# EAGLE board pcb (EAGLE 9.7.0)
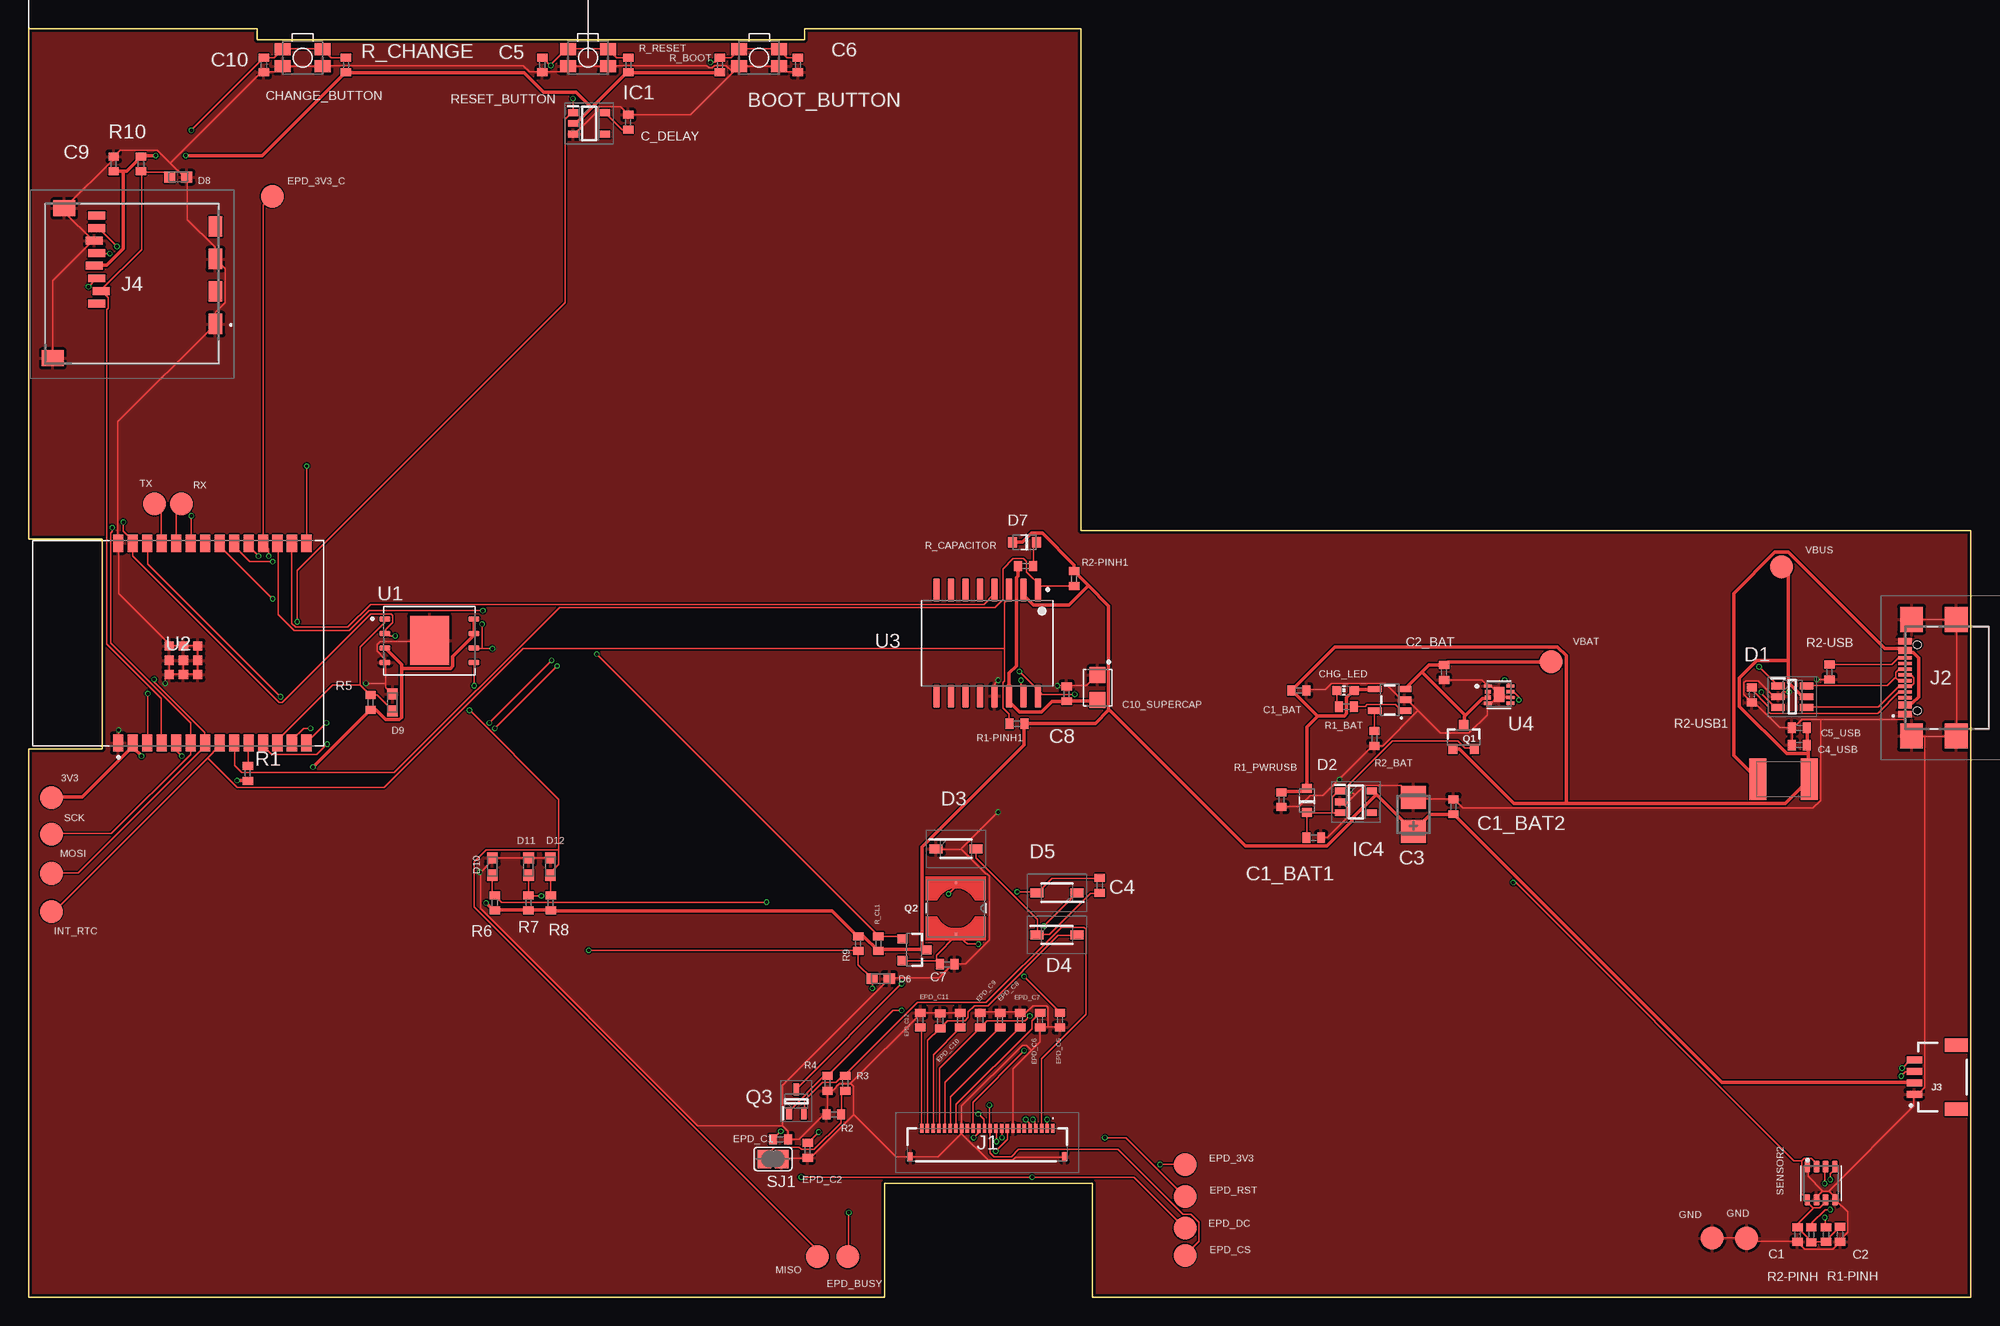
[diagram p0: board, top side]
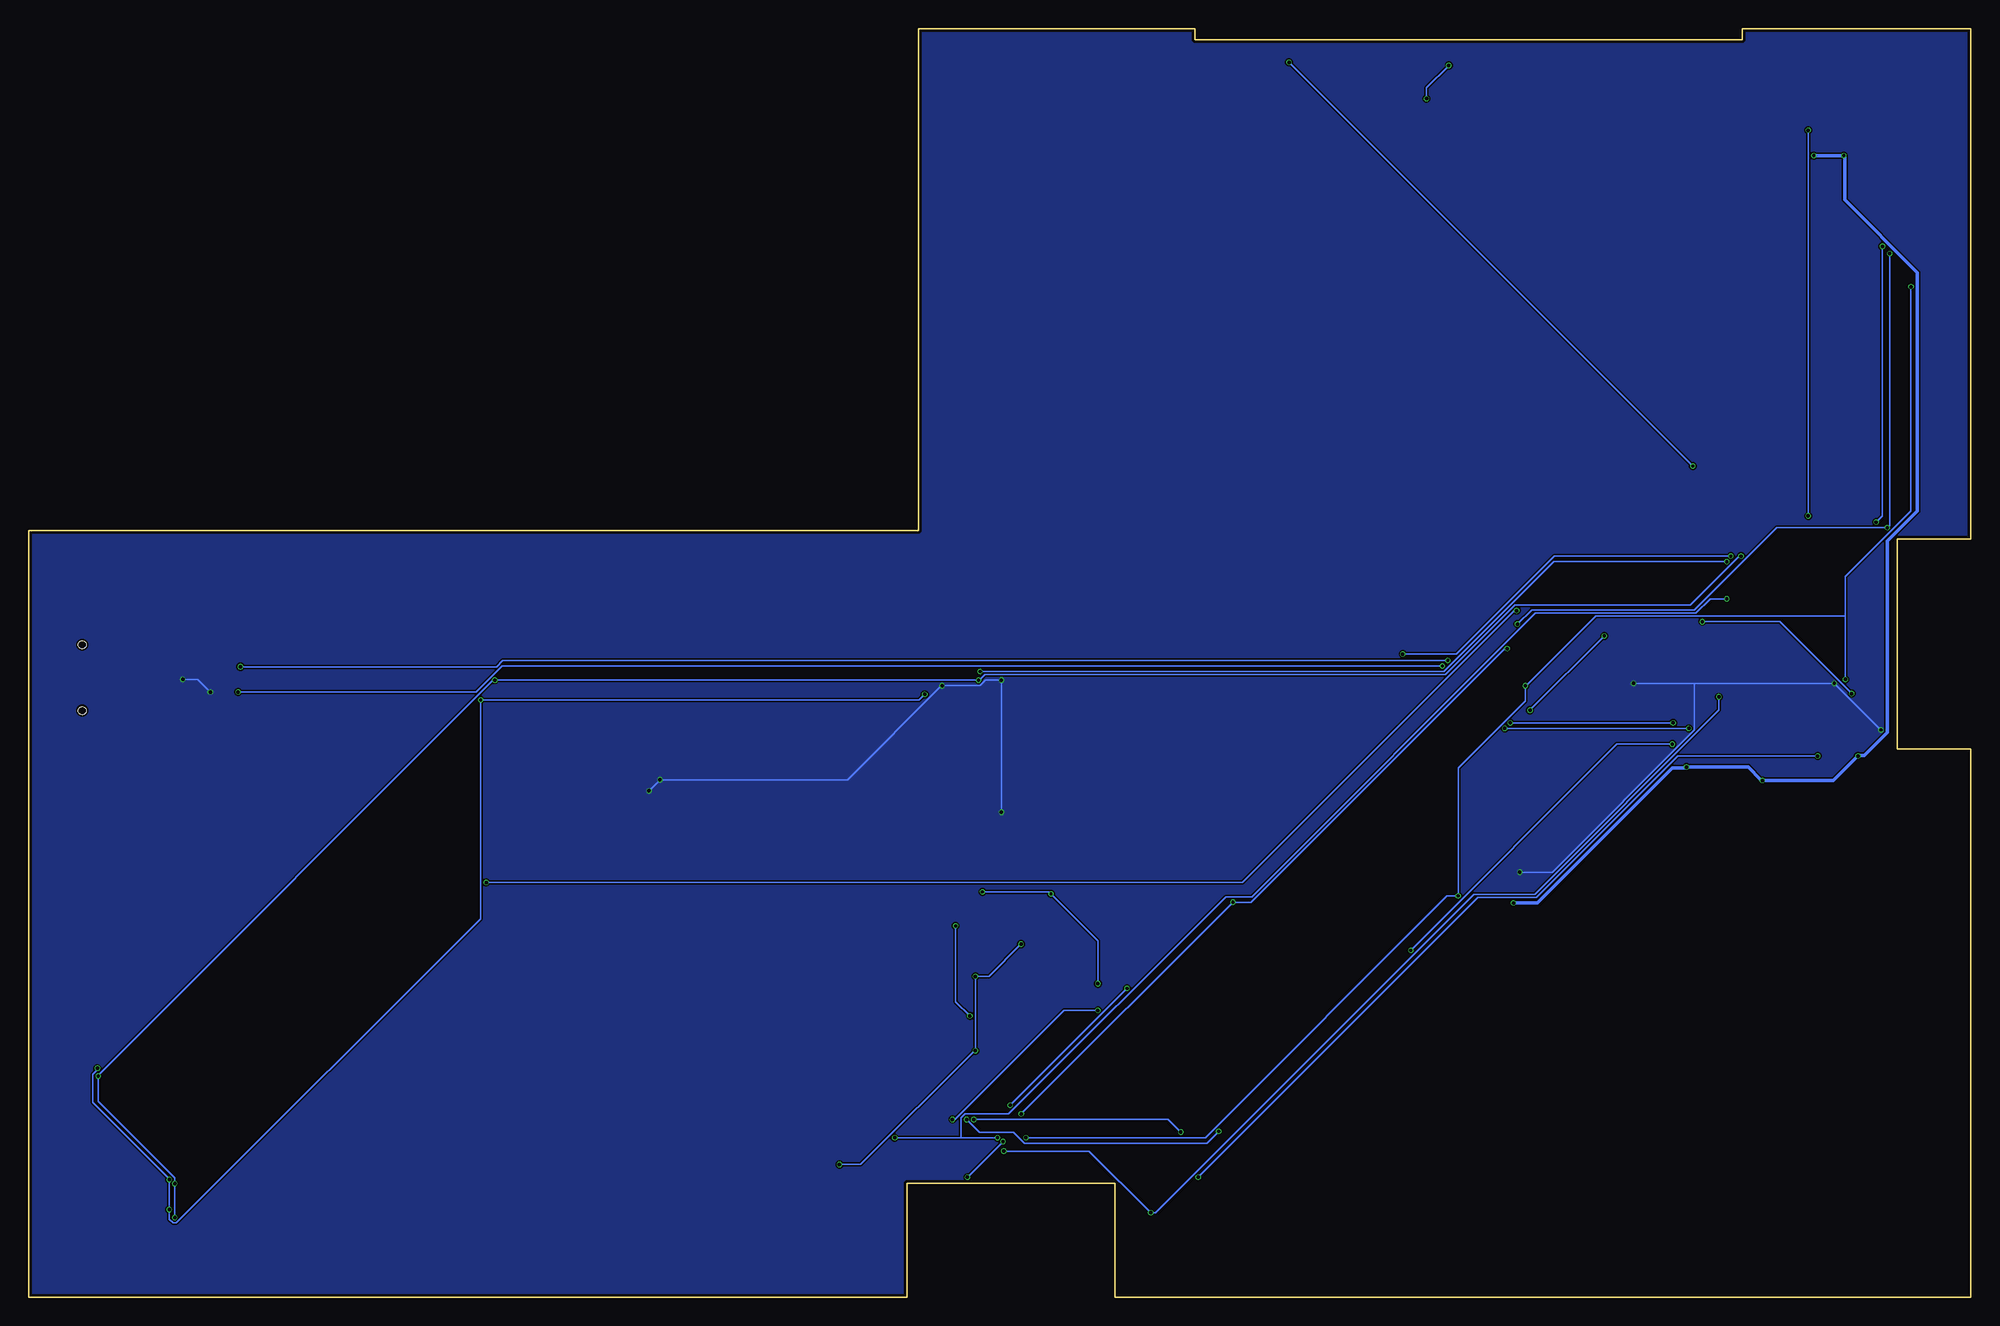
[diagram p1: board, bottom side, seen from below]

Size 170.2 x 111.2 mm. Coordinates in mm from the lower left corner, seen from the top.
Outline: 0,111.2 20,111.2 20,110.2 68,110.2 68,111.2 92.2,111.2 92.2,67.2 170.2,67.2 170.2,0 93.2,0 93.2,10 75,10 75,0 0,0 0,48.05 6.45,48.05 6.45,66.46 0,66.46 0,111.2
Copper layers (1*16): Top 0.035mm / dielectric 1.6mm / Bottom 0.035mm
Design rules "jlcpcb-2layers.dru *": minimum track width 0.15mm, minimum drill 0.3mm, track to track 5mil, track to pad 5mil, pad to pad 5mil, via to via 5mil, smd to smd 5mil, copper to edge 0.2mm, drill to drill 6mil, minimum pad ring 10mil, minimum via ring 3mil, stop-mask expansion 4mil, vias tented up to drill 0mil, thermal gap 10mil
Net classes: 1 putere: width 0.3 mm

## Footprints (pad centres in the part's own frame; a part is rotated, then mirrored left to right if it is on the bottom)
MYBUTTON = smd 1.4 x 1.05: 1 1.75,0.75; 2 -1.75,0.75; 3 -1.75,-0.75; 4 1.75,-0.75
EAGLE-LTSPICE_C0402 = smd 0.7 x 0.9: 1 -0.65,0; 2 0.65,0
RCL_CT3528 = smd 2 x 2.2: + -1.5,0; - 1.5,0
CAPCP3225X100N = smd 1.4 x 1.4: 1 -1.1,0; 2 1.1,0
ADAFRUIT_CHIP-LED0603 = smd 0.8 x 0.8: A 0,-0.75; C 0,0.75
SOT95P280X145-6N = smd 1.2 x 0.6: 1 -1.25,0.95; 2 -1.25,0; 3 -1.25,-0.95; 4 1.25,-0.95; 5 1.25,0; 6 1.25,0.95
ESP32_WROVER_AVX---SD0805S020S1R0_AVX_SD0805S020S1R0_0 = smd 0.8 x 0.9: 1 -1.05,0; 2 1.05,0
SOD3716X135N = smd 1.15 x 0.8: 1 -1.75,0; 2 1.75,0
DIOC1608X36N = smd 0.97 x 0.94: 1 -0.75,0; 2 0.75,0
SOT95P280X125-5N = smd 0.9 x 0.6: 1 -1.4,0.95; 2 -1.4,0; 3 -1.4,-0.95; 4 1.4,-0.95; 5 1.4,0.95
SOT95P280X120-5N = smd 0.9 x 0.6: 1 -1.4,0.95; 2 -1.4,0; 3 -1.4,-0.95; 4 1.4,-0.95; 5 1.4,0.95
FH34SRJ24S05SH99 = smd 0.3 x 0.8: 1 5.75,1.45; 2 5.25,1.45; 3 4.75,1.45; 4 4.25,1.45; 5 3.75,1.45; 6 3.25,1.45; 7 2.75,1.45; 8 2.25,1.45; 9 1.75,1.45; 10 1.25,1.45; 11 0.75,1.45; 12 0.25,1.45; 13 -0.25,1.45; 14 -0.75,1.45; 15 -1.25,1.45; 16 -1.75,1.45; 17 -2.25,1.45; 18 -2.75,1.45; 19 -3.25,1.45; 20 -3.75,1.45; 21 -4.25,1.45; 22 -4.75,1.45; 23 -5.25,1.45; 24 -5.75,1.45 | smd 0.4 x 0.8: MP1 6.75,-1.05; MP2 -6.75,-1.05
SAMACSYS_PARTS_USB4110GFA = smd 0.3 x 1.15: A1 -3.35,3.678; A4 -2.55,3.678; A5 -1.25,3.678; A6 -0.25,3.678; A7 0.25,3.678; A8 1.25,3.678; A9 2.55,3.678; A12 3.35,3.678; B1 3.05,3.678; B4 2.25,3.678; B5 1.75,3.678; B6 0.75,3.678; B7 -0.75,3.678; B8 -1.75,3.678; B9 -2.25,3.678; B12 -3.05,3.678 | smd 2.18 x 2: MP1 -5.11,-0.827; MP2 5.11,-0.827; MP3 -5.11,3.103; MP4 5.11,3.103 | hole 0.65: -2.89,2.603; 2.89,2.603
JST04_1MM_RA = smd 0.6 x 1.35: 1 -1.5,0; 2 -0.5,0; 3 0.5,0; 4 1.5,0 | smd 1.2 x 2: NC1 2.8,-3.675; NC2 -2.8,-3.675
112ATAARR03ATTEND = smd 1.8 x 1.2: G1 10.6,10.4; G2 4.9,10.4; S1 7.75,10.4; S2 2.05,10.4 | smd 1.4 x 1.9: G3 13.6,-3.85; G4 0.45,-2.85 | smd 0.7 x 1.5: P1 8.8,0; P2 7.7,0.4; P3 6.6,0; P4 5.5,-0.2; P5 4.4,0; P6 3.3,-0.2; P7 2.2,0; P8 1.1,0
IND_4828-WE-TPC_WRE = smd 0.254 x 0.152: 1 -2.286,0; 2 2.286,0
ESP32_WROVER_SPARKFUN-IC-POWER_SOT23-5 = smd 0.55 x 1.2: 1 -0.95,-1.3; 2 0,-1.3; 3 0.95,-1.3; 4 0.95,1.3; 5 -0.95,1.3
ESP32C6_VARISTOR_CT/CN1812 = smd 1.5 x 3.6: 1 -2.25,0; 2 2.25,0
ESP32_WROVER_SPARKFUN-DISCRETESEMI_SOT23-3 = smd 0.8 x 0.9: 1 -0.95,-1; 2 0.95,-1; 3 0,1.1
SOT65P210X110-3N = smd 1.05 x 0.5: 1 -1.05,0.65; 2 -1.05,-0.65; 3 1.05,0
ESP32_WROVER_EAGLE-LTSPICE_R0402 = smd 0.7 x 0.9: 1 -0.65,0; 2 0.65,0
ESP32_WROVER_BME680_PSON80P300X300X100-8N = smd 1.016 x 0.5: 1 1.458,1.2; 2 1.458,0.4; 3 1.458,-0.4; 4 1.458,-1.2; 5 -1.458,-1.22; 6 -1.458,-0.4; 7 -1.458,0.4; 8 -1.458,1.2
SJ = smd 1.168 x 1.6: 1 -0.762,0; 2 0.762,0
TP20R = smd 2 x 2: TP 0,0
SON127P600X800X80-9N = smd 0.94 x 0.44: 1 -3.895,1.905; 2 -3.895,0.635; 3 -3.895,-0.635; 4 -3.895,-1.905; 5 3.895,-1.905; 6 3.895,-0.635; 7 3.895,0.635; 8 3.895,1.905 | smd 3.4 x 4.3: 9 0,0
XCVR_ESP32-C6-WROOM-1-N8 = smd 1.5 x 0.9: 1 -8.75,5.26; 2 -8.75,3.99; 3 -8.75,2.72; 4 -8.75,1.45; 5 -8.75,0.18; 6 -8.75,-1.09; 7 -8.75,-2.36; 8 -8.75,-3.63; 9 -8.75,-4.9; 10 -8.75,-6.17; 11 -8.75,-7.44; 12 -8.75,-8.71; 13 -8.75,-9.98; 14 -8.75,-11.25; 15 8.75,-11.25; 16 8.75,-9.98; 17 8.75,-8.71; 18 8.75,-7.44; 19 8.75,-6.17; 20 8.75,-4.9; 21 8.75,-3.63; 22 8.75,-2.36; 23 8.75,-1.09; 24 8.75,0.18; 25 8.75,1.45; 26 8.75,2.72; 27 8.75,3.99; 28 8.75,5.26 | smd 0.8 x 0.8: 29_1 -2.755,0.79; 29_2 -1.505,0.79; 29_3 -0.255,0.79; 29_4 -2.755,-0.46; 29_5 -1.505,-0.46; 29_6 -0.255,-0.46; 29_7 -2.755,-1.71; 29_8 -1.505,-1.71; 29_9 -0.255,-1.71
SOIC127P1032X265-16N = smd 2.05 x 0.59: 1 -4.655,4.445; 2 -4.655,3.175; 3 -4.655,1.905; 4 -4.655,0.635; 5 -4.655,-0.635; 6 -4.655,-1.905; 7 -4.655,-3.175; 8 -4.655,-4.445; 9 4.655,-4.445; 10 4.655,-3.175; 11 4.655,-1.905; 12 4.655,-0.635; 13 4.655,0.635; 14 4.655,1.905; 15 4.655,3.175; 16 4.655,4.445
SON50P200X200X80-9N = smd 0.76 x 0.27: 1 -0.985,0.75; 4 -0.985,-0.75; 5 0.985,-0.75; 6 0.985,-0.25; 7 0.985,0.25; 8 0.985,0.75 | smd 0.61 x 0.305: 2 -0.985,0.25; 3 -0.985,-0.25 | smd 0.9 x 1.3: 9 0,0

## Placement (x,y rotation side)
BOOT_BUTTON  BUTTON_CUSYOMV1  [MYBUTTON]  64,108.65 180 top
C1  100nF  [EAGLE-LTSPICE_C0402]  155,5.5 270 top
C1_BAT  4.7uF  [EAGLE-LTSPICE_C0402]  111.31,53.19 0 top
C1_BAT1  4.7uF  [EAGLE-LTSPICE_C0402]  112.61,40.28 0 top
C1_BAT2  4.7uF  [EAGLE-LTSPICE_C0402]  124.85,42.99 90 top
C2  100nF  [EAGLE-LTSPICE_C0402]  158.73,5.51 270 top
C2_BAT  4.7uF  [EAGLE-LTSPICE_C0402]  124.03,54.77 270 top
C3  100uF TANT  [RCL_CT3528]  121.34,42.32 90 top
C4  4.7uF/25V  [EAGLE-LTSPICE_C0402]  93.85,36.09 90 top
C4_USB  100nF  [EAGLE-LTSPICE_C0402]  155.15,48.4 180 top
C5  1uF  [EAGLE-LTSPICE_C0402]  45.01,108 270 top
C5_USB  4.7uF  [EAGLE-LTSPICE_C0402]  155.15,49.91 180 top
C6  100nF  [EAGLE-LTSPICE_C0402]  67.4,108 270 top
C7  10uF  [EAGLE-LTSPICE_C0402]  80.49,29.19 0 top
C8  100nF  [EAGLE-LTSPICE_C0402]  90.95,52.89 90 top
C9  100nF  [EAGLE-LTSPICE_C0402]  7.43,99.33 90 top
C10  100nF  [EAGLE-LTSPICE_C0402]  20.61,108 270 top
C10_SUPERCAP  CPH3225A  [CAPCP3225X100N]  93.66,53.43 270 top
C_DELAY  100nF  [EAGLE-LTSPICE_C0402]  52.53,102.98 90 top
CHANGE_BUTTON  BUTTON_CUSYOMV1  [MYBUTTON]  24,108.65 180 top
CHG_LED  LED  [ADAFRUIT_CHIP-LED0603]  115.4,53.19 90 top
D1  USBLC6-2SC6Y  [SOT95P280X145-6N]  154.54,52.64 0 top
D2  ESP32_WROVER_AVX---SD0805S020S1R0_AVX_SD0805S020S1R0_0_0AVX_SD0805S020S1R0_0_0  [ESP32_WROVER_AVX---SD0805S020S1R0_AVX_SD0805S020S1R0_0]  112,43.55 90 top
D3  MBR0530  [SOD3716X135N]  81.25,39.31 0 top
D4  MBR0530  [SOD3716X135N]  90.09,31.77 0 top
D5  MBR0530  [SOD3716X135N]  90.09,35.45 180 top
D6  PGB1010603MR  [DIOC1608X36N]  74.66,27.92 180 top
D7  ESP32_WROVER_AVX---SD0805S020S1R0_AVX_SD0805S020S1R0_0_0AVX_SD0805S020S1R0_0_0  [ESP32_WROVER_AVX---SD0805S020S1R0_AVX_SD0805S020S1R0_0]  87.27,66.17 180 top
D8  PGB1010603MR  [DIOC1608X36N]  13.1,98.18 180 top
D9  PGB1010603MR  [DIOC1608X36N]  31.87,52.14 270 top
D10  PGB1010603MR  [DIOC1608X36N]  40.62,37.74 270 top
D11  PGB1010603MR  [DIOC1608X36N]  43.8,37.74 270 top
D12  PGB1010603MR  [DIOC1608X36N]  45.71,37.74 270 top
EPD_C1  1uF/50V  [EAGLE-LTSPICE_C0402]  65.87,13.85 0 top
EPD_C2  1uF/50V  [EAGLE-LTSPICE_C0402]  68.25,12.88 270 top
EPD_C5  0.1uF/50V  [EAGLE-LTSPICE_C0402]  90.38,24.3 270 top
EPD_C6  1uF/50V  [EAGLE-LTSPICE_C0402]  88.62,24.3 270 top
EPD_C7  1uF/50V  [EAGLE-LTSPICE_C0402]  86.88,24.3 90 top
EPD_C8  1uF/50V  [EAGLE-LTSPICE_C0402]  85.12,24.3 90 top
EPD_C9  1uF/50V  [EAGLE-LTSPICE_C0402]  83.38,24.3 90 top
EPD_C10  1uF/50V  [EAGLE-LTSPICE_C0402]  81.62,24.3 90 top
EPD_C11  1uF/50V  [EAGLE-LTSPICE_C0402]  79.88,24.23 90 top
EPD_C12  1uF/50V  [EAGLE-LTSPICE_C0402]  78.12,24.3 90 top
IC1  BD5229G-TR  [SOT95P280X125-5N]  49.1,102.88 0 top
IC4  XC6220A331MR-G  [SOT95P280X120-5N]  116.3,43.41 0 top
J1  FH34SRJ-24S-0.5SH_99_  [FH34SRJ24S05SH99]  84,13.35 0 top
J2  SAMACSYS_PARTS_USB4110-GF-A  [SAMACSYS_PARTS_USB4110GFA]  168.1,54.3 90 top
J3  QWIIC_RIGHT_ANGLE  [JST04_1MM_RA]  165.25,19.3 90 top
J4  112A-TAAR-R03_ATTEND  [112ATAARR03ATTEND]  5.95,95.9 270 top
L1  68uH  [IND_4828-WE-TPC_WRE]  81.25,34.09 270 top
MCP73831  ESP32_WROVER_SPARKFUN-IC-POWER_MCP73831  [ESP32_WROVER_SPARKFUN-IC-POWER_SOT23-5]  119.26,52.37 90 top
PFMF.050.1  ESP32C6_VARISTORCN1812  [ESP32C6_VARISTOR_CT/CN1812]  153.78,45.4 0 top
Q1  20V/4.2A/52mΩ/1.4W  [ESP32_WROVER_SPARKFUN-DISCRETESEMI_SOT23-3]  125.74,49.06 0 top
Q2  20V/4.2A/52mΩ/1.4W  [ESP32_WROVER_SPARKFUN-DISCRETESEMI_SOT23-3]  77.56,30.46 270 top
Q3  SI1308EDL-T1-GE3  [SOT65P210X110-3N]  67.27,17.18 90 top
R1  10K  [ESP32_WROVER_EAGLE-LTSPICE_R0402]  19.2,45.91 270 top
R1-PINH  10K  [ESP32_WROVER_EAGLE-LTSPICE_R0402]  157.5,5.5 270 top
R1-PINH1  10K  [ESP32_WROVER_EAGLE-LTSPICE_R0402]  86.6,50.27 0 top
R1_BAT  200  [ESP32_WROVER_EAGLE-LTSPICE_R0402]  115.48,51.76 0 top
R1_PWRUSB  100K  [ESP32_WROVER_EAGLE-LTSPICE_R0402]  109.78,43.6 90 top
R2  2.2  [ESP32_WROVER_EAGLE-LTSPICE_R0402]  70.55,16.04 0 top
R2-PINH  10K  [ESP32_WROVER_EAGLE-LTSPICE_R0402]  156.22,5.49 270 top
R2-PINH1  10K  [ESP32_WROVER_EAGLE-LTSPICE_R0402]  91.61,62.98 90 top
R2-USB  5k1  [ESP32_WROVER_EAGLE-LTSPICE_R0402]  157.8,54.8 90 top
R2-USB1  5k1  [ESP32_WROVER_EAGLE-LTSPICE_R0402]  150.99,52.8 90 top
R2_BAT  2K  [ESP32_WROVER_EAGLE-LTSPICE_R0402]  117.92,48.98 90 top
R3  0.47  [ESP32_WROVER_EAGLE-LTSPICE_R0402]  71.56,18.76 90 top
R4  10K  [ESP32_WROVER_EAGLE-LTSPICE_R0402]  69.99,18.76 90 top
R5  10K  [ESP32_WROVER_EAGLE-LTSPICE_R0402]  29.95,52.13 270 top
R6  10K  [ESP32_WROVER_EAGLE-LTSPICE_R0402]  40.84,34.58 270 top
R7  10K  [ESP32_WROVER_EAGLE-LTSPICE_R0402]  43.79,34.58 270 top
R8  10K  [ESP32_WROVER_EAGLE-LTSPICE_R0402]  45.74,34.58 270 top
R9  10K  [ESP32_WROVER_EAGLE-LTSPICE_R0402]  72.68,31 90 top
R10  10K  [ESP32_WROVER_EAGLE-LTSPICE_R0402]  9.83,99.33 90 top
R_BOOT  10K  [ESP32_WROVER_EAGLE-LTSPICE_R0402]  60.56,108 270 top
R_CAPACITOR  15  [ESP32_WROVER_EAGLE-LTSPICE_R0402]  87.36,64.09 180 top
R_CHANGE  10K  [ESP32_WROVER_EAGLE-LTSPICE_R0402]  27.8,108 270 top
R_CL1  10K  [ESP32_WROVER_EAGLE-LTSPICE_R0402]  74.45,31 270 top
R_RESET  10K  [ESP32_WROVER_EAGLE-LTSPICE_R0402]  52.55,108 270 top
RESET_BUTTON  BUTTON_CUSYOMV1  [MYBUTTON]  49,108.65 180 top
SENSOR2  ESP32_WROVER_BME680_BME680  [ESP32_WROVER_BME680_PSON80P300X300X100-8N]  157.06,10 90 top
SJ1  SJ  [SJ]  65.22,12.12 180 top
TP1  TPTP20R  [TP20R]  11.02,69.54 0 top
TP2  TPTP20R  [TP20R]  13.36,69.54 0 top
TP3  TPTP20R  [TP20R]  133.41,55.69 0 top
TP4  TPTP20R  [TP20R]  147.53,5.17 0 top
TP5  TPTP20R  [TP20R]  150.54,5.17 0 top
TP6  TPTP20R  [TP20R]  69.11,3.56 0 top
TP7  TPTP20R  [TP20R]  1.97,37.15 0 top
TP8  TPTP20R  [TP20R]  1.97,40.59 0 top
TP9  TPTP20R  [TP20R]  71.78,3.56 0 top
TP10  TPTP20R  [TP20R]  101.33,3.68 0 top
TP11  TPTP20R  [TP20R]  101.33,6.05 0 top
TP12  TPTP20R  [TP20R]  101.33,8.84 0 top
TP13  TPTP20R  [TP20R]  21.34,96.5 0 top
TP14  TPTP20R  [TP20R]  153.6,64.02 0 top
TP15  TPTP20R  [TP20R]  1.97,33.81 0 top
TP16  TPTP20R  [TP20R]  1.97,43.8 0 top
TP17  TPTP20R  [TP20R]  101.33,11.63 0 top
U1  W25Q512JVEIQ  [SON127P600X800X80-9N]  35.12,57.55 0 top
U2  ESP32-C6-WROOM-1-N8  [XCVR_ESP32-C6-WROOM-1-N8]  13.09,57.34 90 top
U3  DS3231SN#  [SOIC127P1032X265-16N]  84,57.34 270 top
U4  MAX17048G+T10  [SON50P200X200X80-9N]  128.84,52.82 0 top

## Library data of the parts
BOOT_BUTTON CHANGE_BUTTON CHG_LED PFMF.050.1 RESET_BUTTON SJ1 TP1-TP17 = DeskAssistant v19 v1
C1 C1_BAT C1_BAT1 C1_BAT2 C2 C2_BAT C4 C4_USB C5 C5_USB C6-C10 C_DELAY EPD_C1 EPD_C2 EPD_C5-EPD_C12 = DeskAssistant v19 v1; SPICEMODEL: NONE; SPICEPREFIX: C
C3 = DeskAssistant v19 v1; SPICEPREFIX: C
C10_SUPERCAP = DeskAssistant v19 v1; AVAILABILITY: Not in stock; CHECK_PRICES: https://www.snapeda.com/parts/CPH3225A/Seiko+Instruments/view-part/?ref=eda; DESCRIPTION: 11 mF (EDLC) Supercapacitor 3.3 V 1210 (3225 Metric) - -; MF: Seiko Instruments; MP: CPH3225A; PACKAGE: 1210 Seiko; PRICE: None; PURCHASE-URL: https://www.snapeda.com/api/url_track_click_mouser/?unipart_id=562593&manufacturer=Seiko Instruments&part_name=CPH3225A&search_term=None; SNAPEDA_LINK: https://www.snapeda.com/parts/CPH3225A/Seiko+Instruments/view-part/?ref=snap
D1 = DeskAssistant v19 v1; AVAILABILITY: In Stock; CHECK_PRICES: https://www.snapeda.com/parts/USBLC6-2SC6Y/STMicroelectronics/view-part/?ref=eda; DESCRIPTION: 17V Clamp 5A (8/20µs) Ipp Tvs Diode Surface Mount SOT-23-6; MF: STMicroelectronics; MP: USBLC6-2SC6Y; PACKAGE: SOT-23-6 STMicroelectronics; PRICE: None; SNAPEDA_LINK: https://www.snapeda.com/parts/USBLC6-2SC6Y/STMicroelectronics/view-part/?ref=snap
D2 D7 = DeskAssistant v19 v1; CENTROID_NOT_SPECIFIED: No; DATASHEET: http://datasheets.avx.com/schottky.pdf; DIGIKEY_DESCRIPTION: DIODE SCHOTTKY 20V 1A 0805; DIGIKEY_PART_NUMBER: 478-7800-1-ND; LEAD_FREE: yes; MF: AVX; MOUSER_PART_NUMBER: 581-SD0805S020S1R0; PACKAGE: 0805 (2012 metric); PREFIX: D; ROHS: yes; TEMPERATURE_RANGE_HIGH: +125°C; TEMPERATURE_RANGE_LOW: -55°C
D3-D5 = DeskAssistant v19 v1; AVAILABILITY: In Stock; CHECK_PRICES: https://www.snapeda.com/parts/MBR0530/Onsemi/view-part/?ref=eda; DESCRIPTION: Diode Schottky 30 V 500mA Surface Mount SOD-123; MF: ON Semiconductor; MP: MBR0530; PACKAGE: SOD-123-2 ON Semiconductor; PRICE: None; PURCHASE-URL: https://www.snapeda.com/api/url_track_click_mouser/?unipart_id=179458&manufacturer=ON Semiconductor&part_name=MBR0530&search_term=None; SNAPEDA_LINK: https://www.snapeda.com/parts/MBR0530/Onsemi/view-part/?ref=snap
D6 D8-D12 = DeskAssistant v19 v1; AVAILABILITY: In Stock; CHECK_PRICES: https://www.snapeda.com/parts/PGB1010603MR/Littelfuse/view-part/?ref=eda; DESCRIPTION: 150V (Typ) Clamp - Ipp Tvs Diode Surface Mount 0603 (1608 Metric); MF: Littelfuse Inc.; MP: PGB1010603MR; PACKAGE: 0603 Littelfuse Inc.; PRICE: None; PURCHASE-URL: https://www.snapeda.com/api/url_track_click_mouser/?unipart_id=5659453&manufacturer=Littelfuse Inc.&part_name=PGB1010603MR&search_term=None; SNAPEDA_LINK: https://www.snapeda.com/parts/PGB1010603MR/Littelfuse/view-part/?ref=snap
IC1 = DeskAssistant v19 v1; DESCRIPTION: Voltage Detector with Adjustable Delay Time: CMOS processes are utilized to develop high precision, low current consumption CMOS reset ICs that allow arbitrary setting of the delay time. The extensive lineup includes both Nch Open Drain and CMOS output types in a wide range of detection voltages (from 2.3V to 6.0V, in 0.1V steps), enabling selection of the ideal solution based on customer requirements. In addition, the entire series is of course both lead-free and RoHS-compliant.; HEIGHT: 1.25mm; MANUFACTURER_NAME: ROHM Semiconductor; MANUFACTURER_PART_NUMBER: BD5229G-TR; MOUSER_PART_NUMBER: 755-BD5229G-TR; MOUSER_PRICE-STOCK: https://www.mouser.co.uk/ProductDetail/ROHM-Semiconductor/BD5229G-TR?qs=4kLU8WoGk0vvnhrrYwdszw%3D%3D
IC4 = DeskAssistant v19 v1; DESCRIPTION: LDO Voltage Regulators; HEIGHT: 1.2mm; MANUFACTURER_NAME: Torex; MANUFACTURER_PART_NUMBER: XC6220A331MR-G; MOUSER_PART_NUMBER: 865-XC6220A331MR-G; MOUSER_PRICE-STOCK: https://www.mouser.co.uk/ProductDetail/Torex-Semiconductor/XC6220A331MR-G?qs=AsjdqWjXhJ8ZSWznL1J0gg%3D%3D
J1 = DeskAssistant v19 v1; DESCRIPTION: 24 Position FFC, FPC Connector Contacts, Top and Bottom 0.020" (0.50mm) Surface Mount, Right Angle; HEIGHT: 1.1mm; MANUFACTURER_NAME: Hirose; MANUFACTURER_PART_NUMBER: FH34SRJ-24S-0.5SH(99); MOUSER_PART_NUMBER: 798-FH34SRJ24S05SH99; MOUSER_PRICE-STOCK: https://www.mouser.co.uk/ProductDetail/Hirose-Connector/FH34SRJ-24S-0.5SH99?qs=vcbW%252B4%252BSTIpKBl5ap9J8Fw%3D%3D
J2 = DeskAssistant v19 v1; DESCRIPTION: CONN USB 2.0 TYPE-C R/A SMT; HEIGHT: 3.26mm; MANUFACTURER_NAME: GCT (GLOBAL CONNECTOR TECHNOLOGY); MANUFACTURER_PART_NUMBER: USB4110-GF-A; MOUSER_PART_NUMBER: 640-USB4110-GF-A; MOUSER_PRICE-STOCK: https://www.mouser.co.uk/ProductDetail/GCT/USB4110-GF-A?qs=KUoIvG%2F9IlYiZvIXQjyJeA%3D%3D
J3 = DeskAssistant v19 v1; PROD_ID: CONN-13694
J4 = DeskAssistant v19 v1; DESCRIPTION: Micro SD Card Socket, Push-Push Type, Top Mount, SMT, H=1.83mm, 10u; HEIGHT: 1.9mm; MANUFACTURER_NAME: ATTEND; MANUFACTURER_PART_NUMBER: 112A-TAAR-R03 ATTEND
L1 = DeskAssistant v19 v1; COPYRIGHT: Copyright (C) 2024 Ultra Librarian. All rights reserved.; MANUFACTURER_PART_NUMBER: 744043680; MFR_NAME: Wurth Electronics
MCP73831 = DeskAssistant v19 v1; PROD_ID: IC-09995
Q1 Q2 = DeskAssistant v19 v1; PROD_ID: TRAN-14388
Q3 = DeskAssistant v19 v1; AVAILABILITY: In Stock; CHECK_PRICES: https://www.snapeda.com/parts/SI1308EDL-T1-GE3/Vishay+Siliconix/view-part/?ref=eda; DESCRIPTION: Si1308EDL-T1-GE3 N-channel MOSFET Transistor, 1.5 A, 30 V, 3-Pin SC-70 | Siliconix / Vishay SI1308EDL-T1-GE3; MF: Vishay Siliconix; MP: SI1308EDL-T1-GE3; PACKAGE: SOT-323 Vishay Semiconductor; PRICE: None; PURCHASE-URL: https://www.snapeda.com/api/url_track_click_mouser/?unipart_id=274603&manufacturer=Vishay Siliconix&part_name=SI1308EDL-T1-GE3&search_term=None; SNAPEDA_LINK: https://www.snapeda.com/parts/SI1308EDL-T1-GE3/Vishay+Siliconix/view-part/?ref=snap
R1 R1-PINH R1-PINH1 R1_BAT R1_PWRUSB R2 R2-PINH R2-PINH1 R2-USB R2-USB1 R2_BAT R3-R10 R_BOOT R_CAPACITOR R_CHANGE R_CL1 R_RESET = DeskAssistant v19 v1; SPICEMODEL: NONE; SPICEPREFIX: R
SENSOR2 = DeskAssistant v19 v1; AVAILABILITY: Unavailable; DESCRIPTION: Integrated Environmental Unit; MF: Bosch Sensortec; MP: BME680; PACKAGE: LGA-8 Bosch Tools; PRICE: None
U1 = DeskAssistant v19 v1; AVAILABILITY: In Stock; CHECK_PRICES: https://www.snapeda.com/parts/W25Q512JVEIQ/Winbond+Electronics/view-part/?ref=eda; DESCRIPTION: FLASH - NOR Memory IC 512Mb (64M x 8) SPI - Quad I/O 133 MHz 8-WSON (8x6); MF: Winbond Electronics; MP: W25Q512JVEIQ; PACKAGE: Package; PRICE: None; SNAPEDA_LINK: https://www.snapeda.com/parts/W25Q512JVEIQ/Winbond+Electronics/view-part/?ref=snap
U2 = DeskAssistant v19 v1; AVAILABILITY: In Stock; CHECK_PRICES: https://www.snapeda.com/parts/ESP32-C6-WROOM-1-N8/Espressif+Systems/view-part/?ref=eda; DESCRIPTION: Multiprotocol Modules ESP32-C6 module, Wi-Fi 6 in 2.4 GHz band, Bluetooth 5, Zigbee 3.0 and Thread. ESP34-WROOM Compatible - ENGINEERING SAMPLE; MF: Espressif Systems; MP: ESP32-C6-WROOM-1-N8; PACKAGE: None; PRICE: None; SNAPEDA_LINK: https://www.snapeda.com/parts/ESP32-C6-WROOM-1-N8/Espressif+Systems/view-part/?ref=snap
U3 = DeskAssistant v19 v1; AVAILABILITY: In Stock; CHECK_PRICES: https://www.snapeda.com/parts/DS3231SN%23/Analog+Devices/view-part/?ref=eda; DESCRIPTION: Extremely Accurate I²C-Integrated RTC/TCXO/Crystal; MF: Analog Devices; MP: DS3231SN#; PACKAGE: SOIC-16 Maxim; PRICE: None; PURCHASE-URL: https://www.snapeda.com/api/url_track_click_mouser/?unipart_id=99048&manufacturer=Analog Devices&part_name=DS3231SN#&search_term=None; SNAPEDA_LINK: https://www.snapeda.com/parts/DS3231SN%23/Analog+Devices/view-part/?ref=snap
U4 = DeskAssistant v19 v1; AVAILABILITY: In Stock; CHECK_PRICES: https://www.snapeda.com/parts/MAX17048G+T10/Analog+Devices/view-part/?ref=eda; DESCRIPTION: 3µA 1-Cell/2-Cell Fuel Gauge with ModelGauge; MF: Analog Devices; MP: MAX17048G+T10; PACKAGE: TDFN-8 Maxim; PRICE: None; PURCHASE-URL: https://www.snapeda.com/api/url_track_click_mouser/?unipart_id=329239&manufacturer=Analog Devices&part_name=MAX17048G+T10&search_term=None; SNAPEDA_LINK: https://www.snapeda.com/parts/MAX17048G+T10/Analog+Devices/view-part/?ref=snap

## Nets
3V3 [putere]: C1_BAT2.1 C3.+ C9.1 D7.2 IC1.2 IC4.5 J3.2 J4.P4 Q2.3 R1-PINH1.2 R1.2 R2-PINH1.2 R5.2 R6.2 R7.2 R8.2 R9.2 R10.2 R_BOOT.2 R_CHANGE.2 R_CL1.2 R_RESET.2 TP16.TP U1.3 U1.7 U1.8 U2.2 U3.2
32KHZ: R2-PINH1.1 U2.9 U3.1
DN: D1.4 J2.A7 J2.B7
DP: D1.6 J2.A6 J2.B6
EPD_3V3: C7.1 EPD_C5.1 J1.15 J1.16 L1.2 Q2.2 TP17.TP
EPD_3V3_C: Q2.1 R_CL1.1 TP13.TP U2.18
EPD_BUSY: J1.9 TP9.TP U2.26
EPD_CS: D6.2 J1.12 R9.1 TP10.TP U2.11
EPD_DC: J1.11 TP11.TP U2.5
EPD_RST: J1.10 TP12.TP U2.21
FLASH_CS: D9.2 R5.1 U1.1 U2.12
GDR: J1.2 Q3.1 R4.2
GND: BOOT_BUTTON.1 BOOT_BUTTON.2 C1.2 C1_BAT1.2 C1_BAT2.2 C1_BAT.2 C2.2 C2_BAT.2 C3.- C4_USB.2 C5.2 C5_USB.2 C6.2 C7.2 C8.2 C9.2 C10.2 C10_SUPERCAP.1 C_DELAY.2 CHANGE_BUTTON.1 CHANGE_BUTTON.2 D1.2 D3.1 D6.1 D8.1 D9.1 D10.1 D11.1 D12.1 EPD_C1.2 EPD_C2.2 EPD_C5.2 EPD_C6.2 EPD_C7.2 EPD_C8.2 EPD_C9.2 EPD_C10.2 EPD_C11.2 EPD_C12.2 IC1.3 IC4.2 J1.8 J1.17 J1.MP1 J1.MP2 J2.A1 J2.A12 J2.B1 J2.B12 J2.MP1 J2.MP2 J2.MP3 J2.MP4 J3.1 J4.G1 J4.G2 J4.G3 J4.G4 J4.P6 MCP73831.2 R1_PWRUSB.1 R2-USB1.1 R2-USB.1 R2.1 R2_BAT.1 R4.1 RESET_BUTTON.1 RESET_BUTTON.2 SENSOR2.1 SENSOR2.5 SENSOR2.7 SJ1.1 TP4.TP TP5.TP U1.4 U1.9 U2.1 U2.28 U2.29_1 U2.29_2 U2.29_3 U2.29_4 U2.29_5 U2.29_6 U2.29_7 U2.29_8 U2.29_9 U3.13 U4.1 U4.4 U4.6 U4.9
GPIO8: R1.1 U2.10
I2C_PW: C1.1 C2.1 R1-PINH.2 R2-PINH.2 SENSOR2.2 SENSOR2.6 SENSOR2.8 U2.17
INT_RTC: R1-PINH1.1 TP15.TP U2.8 U3.3
IO/BOOT: BOOT_BUTTON.3 BOOT_BUTTON.4 C6.1 R_BOOT.1 U2.15
IO/CHANGE: C10.1 CHANGE_BUTTON.3 CHANGE_BUTTON.4 R_CHANGE.1 U2.23
MISO: D12.2 J4.P7 R8.1 TP6.TP U1.2 U2.27
MOSI: D11.2 J1.14 J4.P3 R7.1 TP7.TP U1.5 U2.7
N$2: J2.A5 R2-USB1.2
N$6: J2.B5 R2-USB.2
N$10: C1_BAT1.1 D2.1 IC4.1 IC4.3 Q1.2
N$11: C4.1 D3.2 D4.1
N$12: MCP73831.1 R1_BAT.2
N$14: CHG_LED.C R1_BAT.1
N$15: MCP73831.5 R2_BAT.2
N$16: EPD_C12.1 J1.24
N$17: C_DELAY.1 IC1.5
N$18: EPD_C10.1 J1.22
N$20: EPD_C8.1 J1.20
N$21: EPD_C7.1 J1.19
N$22: EPD_C6.1 J1.18
N$25: EPD_C1.1 J1.4
N$26: EPD_C2.1 J1.5
N$29: D7.1 R_CAPACITOR.1
PREVGH: D5.1 EPD_C9.1 J1.21
PREVGL: D4.2 EPD_C11.1 J1.23
RESE: J1.3 Q3.2 R3.2
RESE': R2.2 R3.1 SJ1.2
RESET: C5.1 IC1.1 R_RESET.1 RESET_BUTTON.3 RESET_BUTTON.4 U2.3
RTC_RST: U2.16 U3.4
RX: TP2.TP U2.24
SCK: D10.2 J1.13 J4.P5 R6.1 TP8.TP U1.6 U2.6
SCL: J3.4 R2-PINH.1 SENSOR2.4 U2.20 U3.16 U4.7
SDA: J3.3 R1-PINH.1 SENSOR2.3 U2.19 U3.15 U4.8
SRC: C4.2 D5.2 L1.1 Q3.3
SS_SD: D8.2 J4.P2 R10.1 U2.4
TX: TP1.TP U2.25
USB_D+: D1.1 U2.14
USB_D-: D1.3 U2.13
VBAT [putere]: C2_BAT.1 MCP73831.3 Q1.3 TP3.TP U4.2 U4.3
VBUS [putere]: C1_BAT.1 C4_USB.1 C5_USB.1 CHG_LED.A D1.5 D2.2 MCP73831.4 PFMF.050.1.2 Q1.1 R1_PWRUSB.2 TP14.TP
VRTC [putere]: C8.1 C10_SUPERCAP.2 R_CAPACITOR.2 U3.14
VUSB [putere]: J2.A4 J2.A9 J2.B4 J2.B9 PFMF.050.1.1

## Tracks (layer width: path | path; a pad name or v marks a point on that pad's centre or on a via)
3V3  (via drill 0.3)
  Top 0.3: 118.08,44.08 121.3,40.86 C3.+ 121.44,40.93 122.82,42.31 124.83,42.31 C1_BAT2.1 124.97,42.24 148.38,18.84 165.2,18.84 J3.2 | 118.08,44.08 117.83,44.32 117.7,44.32 IC4.5 | 8.28,98.68 8.56,98.68 9.8,99.93 R10.2 9.94,100.07 v11.12,100.07 | 8.28,98.68 7.45,98.68 C9.1 | 8.28,98.68 8.28,91.89 6.83,90.44 5.79,90.44 J4.P4 | 49.31,104.26 52.39,107.34 52.53,107.34 R_RESET.2 52.67,107.34 60.5,107.34 R_BOOT.2 | 49.31,104.26 47.96,102.91 47.76,102.91 IC1.2 | 49.31,104.26 47.96,105.61 45.12,105.61 43.39,107.34 27.81,107.34 R_CHANGE.2 27.67,107.27 20.47,100.07 v13.75,100.07 | U1.8 39.03,59.42 39.03,58.24 U1.7 39.03,58.03 37.16,56.16 37.16,55.33 36.95,55.12 32.66,55.12 | 32.66,55.12 32.66,55.47 31.27,56.85 U1.3 | 32.66,55.12 32.66,50.83 32.45,50.62 31.27,50.62 30.44,51.45 29.96,51.45 R5.2 29.82,51.38 v24.9,46.47 | v18.25,45.29 19.15,45.29 R1.2 | v9.88,47.44 9.11,48.2 9.11,48.54 U2.2 8.97,48.13 4.68,43.84 1.98,43.84 TP16.TP | 94.64,51.45 93.46,50.28 87.3,50.28 R1-PINH1.2 87.23,50.14 87.23,48.41 78.29,39.47 78.29,30.61 Q2.3 78.64,30.47 74.55,30.47 R_CL1.2 74.42,30.4 73.17,31.65 R9.2 72.55,31.72 70.4,33.86 45.88,33.86 R8.2 45.68,33.93 43.88,33.93 R7.2 43.74,33.93 40.9,33.93 R6.2 40.69,33.93 v40.07,34.56 | 94.64,51.45 94.64,60.59 92.87,62.36 | 92.87,62.36 91.66,63.57 R2-PINH1.2 91.59,63.78 91.59,64.19 88.82,66.97 87.85,66.97 87.09,66.2 86.26,66.2 D7.2 | 92.87,62.36 91.17,60.66 88.06,60.66 87.23,61.49 87.23,61.98 U3.2 | 118.08,44.08 115.97,41.97 115.97,41.76 113.75,39.54 106.62,39.54 94.78,51.38 94.64,51.45
  Bottom 0.3: v13.75,100.07 v11.12,100.07 11.05,99.93 11.05,96.19 4.68,89.82 4.68,68.9 7.31,66.27 7.31,49.51 9.32,47.51 9.74,47.51 v9.88,47.44 12.02,45.29 v18.25,45.29 18.39,45.36 19.5,46.47 v24.9,46.47 25.04,46.4 26.15,46.4 37.99,34.56 v40.07,34.56
32KHZ
  Top 0.15: R2-PINH1.1 91.59,62.33 88.75,62.33 88.47,62.05 U3.1 88.68,62.33 87.44,63.57 87.44,64.47 87.16,64.75 86.26,64.75 85.36,63.85 85.36,61.15 84.67,60.45 46.51,60.45 32.03,45.98 18.67,45.98 18.05,46.6 18.05,48.54 U2.9
DN
  Top 0.15: J2.A7 164.44,54.5 165,54.5 165.2,54.29 165.2,53.81 165,53.6 164.44,53.6 J2.B7 164.37,53.53 163.89,53.53 162.09,51.73 155.85,51.73 D1.4
DP
  Top 0.15: 163.61,54.29 163.82,54.08 164.37,54.08 J2.A6 | 163.61,54.29 163.61,54.78 163.82,54.98 164.37,54.98 J2.B6 | D1.6 155.85,53.6 162.85,53.6 163.54,54.29 163.61,54.29
EPD_3V3  (via drill 0.3)
  Top 0.15: Q2.2 76.63,29.5 79.54,29.5 79.82,29.22 C7.1 79.54,29.57 79.54,29.98 81.27,31.72 L1.2 82.25,30.95 v83.21,30.95 | J1.16 82.31,14.82 82.73,14.82 J1.15 82.73,14.89 82.73,17.11 v87.23,21.61 | v87.23,28.12 90.34,25 EPD_C5.1 | v99.14,11.63 101.28,11.63 TP17.TP
  Bottom 0.15: v83.21,30.95 86.05,28.12 v87.23,28.12 v87.23,21.61 87.3,21.61 97.27,11.63 v99.14,11.63
EPD_3V3_C  (via drill 0.3)
  Top 0.15: Q2.1 76.56,31.44 76.36,31.65 74.48,31.65 R_CL1.1 74.42,31.72 v49.76,56.37 | TP13.TP 21.3,96.47 20.54,95.7 20.54,66.13 U2.18 20.54,66.06 21.02,65.58 v21.02,64.96
  Bottom 0.15: v49.76,56.37 45.05,56.37 36.47,64.96 v21.02,64.96
EPD_BUSY  (via drill 0.3)
  Top 0.15: v84.73,12.81 85.77,13.85 85.77,14.75 J1.9 | v71.85,7.41 71.85,3.6 TP9.TP | v22.06,52.63 10.43,64.26 10.43,66.06 U2.26
  Bottom 0.15: v84.73,12.81 77.25,12.81 v71.85,7.41 71.44,7.41 43.53,35.32 38.2,35.32 22.06,51.45 v22.06,52.63
EPD_CS  (via drill 0.3)
  Top 0.15: TP10.TP 101.35,3.74 102.53,4.92 102.53,6.58 101.84,7.27 101.15,7.27 95.47,12.95 86.74,12.95 86.12,12.33 84.6,12.33 84.25,12.67 84.25,14.75 J1.12 84.18,14.82 v84.18,16.83 | v26.15,48.48 25.25,47.58 21.3,47.58 20.54,48.34 20.54,48.54 U2.11 | v49.07,30.4 72.61,30.4 R9.1 72.68,30.33 72.68,29.15 73.86,27.98 D6.2 73.93,27.91 v73.93,27.08
  Bottom 0.15: v26.15,48.48 31,48.48 v49.07,30.4 | v73.93,27.08 v84.18,16.83
EPD_DC  (via drill 0.3)
  Top 0.15: v84.8,13.64 84.8,14.75 J1.11 | TP11.TP 101.28,6.09 96.85,10.53 v87.92,10.53 v67.7,10.53 | v13.41,47.44 12.92,47.92 12.92,48.54 U2.5
  Bottom 0.15: v87.92,10.53 v84.8,13.64 | v13.41,47.44 25.66,47.44 38.06,35.04 43.18,35.04 v67.7,10.53
EPD_RST  (via drill 0.3)
  Top 0.15: v85.29,13.99 85.29,14.75 J1.10 | v94.29,13.99 96.16,13.99 101.28,8.86 TP12.TP | v21.37,61.22 16.73,65.86 16.73,66.06 U2.21
  Bottom 0.15: v94.29,13.99 88.47,13.99 | 88.47,13.99 v85.29,13.99 | v21.37,61.22 22.83,61.22 24.07,59.97 38.13,59.97 62.99,35.11 65.28,35.11 84.32,16.07 88.13,16.07 88.47,15.72 88.47,13.99
FLASH_CS
  Top 0.15: D9.2 31.83,51.45 30.51,52.77 29.96,52.77 R5.1 29.89,52.84 29.06,53.67 | 29.06,53.67 29.06,56.99 31.2,59.14 31.2,59.42 U1.1 | 29.06,53.67 26.63,53.67 21.86,48.89 21.86,48.61 U2.12
GDR  (via drill 0.3)
  Top 0.15: v89.23,15.58 89.23,14.82 J1.2 | v76.49,25.14 75.73,25.14 70.05,19.46 R4.2 69.92,19.39 69.71,19.39 66.66,16.34 66.66,16.14 Q3.1
  Bottom 0.15: v89.23,15.58 89.03,15.58 79.47,25.14 v76.49,25.14
GND  (via drill 0.3)
  Top 0.15: 31.27,53.81 31.27,53.46 31.83,52.91 D9.1 | 31.27,53.81 31.27,55.61 U1.4 31.2,55.68 31.2,55.95 30.51,56.65 30.51,57.2 30.79,57.48 35.01,57.48 35.08,57.55 U1.9 | U2.29_1 12.3,54.64 12.3,55.82 U2.29_2 | U2.29_4 13.55,54.64 12.37,54.64 U2.29_1 | U2.29_5 13.55,55.82 13.55,54.71 U2.29_4 | U2.29_4 13.61,54.64 14.79,54.64 U2.29_7 14.79,54.71 14.79,55.82 U2.29_8 14.79,55.88 14.79,57.06 U2.29_9 14.79,57.13 13.61,57.13 U2.29_6 13.55,57.13 12.37,57.13 U2.29_3 12.37,57.2 7.87,61.7 7.87,66.06 U2.28 7.8,66.13 7.8,76.73 16.32,85.25 J4.G1 16.38,85.32 16.38,86.36 17.21,87.19 17.21,90.16 16.38,91 J4.G2 16.32,91.06 16.32,92.03 13.89,94.46 13.89,98.13 D8.1 13.82,98.2 13.61,98.2 12.4,99.41 | v7.87,49.72 7.87,48.61 U2.1 | v11.95,53.81 11.95,54.29 12.23,54.57 U2.29_1 | v29.54,53.81 31.27,53.81 | C6.2 67.35,107.41 66.24,107.41 BOOT_BUTTON.2 65.69,107.89 62.3,107.89 BOOT_BUTTON.1 | IC1.3 47.76,101.94 48.17,102.35 48.24,102.35 49.83,103.94 49.83,104.22 49.97,104.36 51.84,104.36 52.53,103.67 C_DELAY.2 52.6,103.67 58,103.67 62.23,107.89 BOOT_BUTTON.1 | BOOT_BUTTON.1 61.67,107.41 61.12,107.96 60.08,107.96 59.87,107.75 59.6,107.75 59.39,107.96 50.8,107.96 RESET_BUTTON.2 50.73,107.89 47.27,107.89 RESET_BUTTON.1 47.2,107.89 46.72,107.41 45.05,107.41 C5.2 44.98,107.41 43.88,107.41 43.32,107.96 25.8,107.96 CHANGE_BUTTON.2 25.73,107.89 22.27,107.89 CHANGE_BUTTON.1 22.2,107.89 21.72,107.41 20.61,107.41 C10.2 20.54,107.34 20.33,107.34 12.4,99.41 | 12.4,99.41 11.26,100.55 8,100.55 7.45,100 C9.2 7.38,99.93 7.38,99.72 3.16,95.5 J4.G4 3.16,95.43 3.16,95.08 5.58,92.66 5.72,92.66 J4.P6 5.58,92.59 2.12,89.12 2.12,82.34 J4.G3
  Top 0.15: v156.69,54.15 R2-USB.1 | v154.26,53.05 153.71,53.05 153.36,52.7 D1.2 153.22,52.63 152.94,52.63 151.56,54.02 150.45,54.02 150.31,53.88 150.31,52.84 150.94,52.22 R2-USB1.1 151.01,52.15 151.21,52.15 153.43,49.93 154.47,49.93 C5_USB.2 | C4_USB.2 154.54,48.41 154.54,49.86 C5_USB.2 | J2.B12 164.44,51.24 164.44,50.97 J2.A1 164.44,50.9 164.44,50.62 | 164.44,50.62 164.44,49.72 164.93,49.24 J2.MP3 165.06,49.17 166.17,49.17 | 166.17,49.17 168.87,49.17 J2.MP1 168.94,49.24 168.94,59.35 J2.MP2 168.87,59.42 165.06,59.42 J2.MP4 164.93,59.35 164.44,58.86 164.44,57.69 J2.A12 164.44,57.62 164.44,57.41 J2.B1 | 164.44,50.62 157.03,50.62 | 157.03,50.62 155.37,50.62 154.61,49.86 C5_USB.2 | TP4.TP 147.54,5.19 150.52,5.19 TP5.TP 150.59,5.12 150.8,4.92 154.95,4.92 C1.2 155.02,4.85 155.65,4.22 158.07,4.22 158.69,4.85 C2.2 158.76,4.92 158.76,5.05 159.39,5.68 159.39,7.48 158.35,8.52 SENSOR2.5 158.28,8.59 158.28,8.79 157.79,9.28 | 157.17,9.28 156.69,8.79 156.69,8.59 SENSOR2.7 | 157.79,9.28 157.17,9.28 | SENSOR2.1 155.92,11.43 155.92,10.6 157.17,9.35 157.17,9.28 | 157.79,9.28 157.79,9.35 165.2,16.76 165.2,17.8 J3.1 165.27,17.87 165.62,17.87 166.17,18.42 166.17,49.17 | EPD_C9.2 83.42,25 85.08,25 EPD_C8.2 85.15,25 86.81,25 EPD_C7.2 86.95,24.93 87.36,24.93 87.99,25.55 89.17,25.55 89.31,25.41 89.31,23.68 | 87.89,21.64 88.61,22.37 88.61,23.61 EPD_C6.2 88.68,23.68 89.31,23.68 | 87.89,21.64 86.26,20.01 86.26,14.82 J1.8 | 89.31,23.68 90.34,23.68 EPD_C5.2 | 81.69,14.34 79.68,12.33 77.25,12.33 J1.MP2 77.19,12.33 76.01,12.33 72.34,16 72.27,16 | 81.69,14.34 81.69,14.75 J1.17 81.76,14.82 81.76,16.76 87.09,22.09 87.44,22.09 87.89,21.64
  Top 0.15: J1.MP1 90.69,12.26 86.47,12.26 86.26,12.05 84.04,12.05 81.76,14.34 81.69,14.34 | D12.1 45.68,38.5 43.81,38.5 D11.1 43.74,38.5 40.62,38.5 D10.1 40.55,38.43 40.55,38.23 39.58,37.26 | SJ1.1 66.04,12.19 68.25,12.19 EPD_C2.2 68.32,12.26 68.53,12.26 72.27,16 | EPD_C10.2 81.62,24.93 79.89,24.93 EPD_C11.2 79.82,24.93 78.16,24.93 EPD_C12.2 78.16,24.86 72.03,18.73 | 72.03,18.73 71.99,18.7 71.02,18.7 70.47,18.14 70.05,18.14 R4.1 69.98,18.07 69.98,16.14 69.92,16.07 R2.1 69.84,16 69.64,16 67.49,13.85 EPD_C1.2 66.52,13.92 66.52,14.54 66.04,15.03 | 72.27,16 72.27,18.49 72.03,18.73 | 39.58,37.26 39.58,34.07 58.63,15.03 66.04,15.03 | C1_BAT1.2 113.27,40.3 113.82,40.3 115.55,42.03 115.55,42.87 115.07,43.35 114.93,43.35 IC4.2 115.34,43.14 116.21,44.01 | 116.21,44.01 117.07,44.87 120.26,44.87 121.3,43.84 C3.- 121.37,43.77 121.44,43.7 124.83,43.7 C1_BAT2.2 124.9,43.63 125.66,42.87 156.34,42.87 157.03,43.56 157.03,50.62 | 114.82,45.39 117.7,48.27 117.91,48.27 R2_BAT.1 117.97,48.34 118.67,48.34 121.75,51.42 | 114.82,45.39 113.4,43.97 112.3,43.97 111.33,43 109.8,43 R1_PWRUSB.1 | U4.9 128.85,52.77 128.15,52.08 127.88,52.08 U4.4 127.81,52.01 127.81,51.04 126.22,49.44 123.72,49.44 121.75,51.42 | U4.6 129.82,52.63 129.05,52.63 128.92,52.77 U4.9 | U4.9 128.85,52.84 128.15,53.53 127.88,53.53 U4.1 127.81,53.6 127.32,54.08 124.07,54.08 C2_BAT.2 | C1_BAT.2 112.02,53.25 113.61,53.25 114.17,53.81 118.87,53.81 120.26,52.42 120.54,52.42 MCP73831.2 120.61,52.35 120.81,52.35 121.75,51.42 | v115.83,44.39 116.21,44.01 | v114.86,45.36 114.82,45.39 | C10_SUPERCAP.1 93.6,54.5 92.7,53.6 90.97,53.6 C8.2 90.9,53.6 v90.14,53.6
  Top 0.15: v84.94,54.08 84.67,53.81 84.67,52.7 U3.13 | 81.76,39.27 79.54,39.27 D3.1 | 81.76,39.27 83.9,37.12 83.97,37.12 84.18,36.91 84.18,31.3 82.1,29.22 81.2,29.22 C7.2 81.13,29.15 80.92,29.15 79.75,27.98 75.45,27.98 D6.1 75.39,27.91 66.04,18.56 66.04,15.03 | v84.94,42.52 81.76,39.33 81.76,39.27 | v39.51,37.26 39.58,37.26
  Bottom 0.15: v7.87,49.72 v11.95,53.81 24.21,53.81 | 24.21,53.81 v29.54,53.81 | v156.69,54.15 155.37,54.15 v154.26,53.05 | v115.83,44.39 v114.86,45.36 98.44,45.36 90.2,53.6 v90.14,53.6 86.81,53.6 86.33,54.08 v84.94,54.08 v84.94,42.52 | 24.21,53.81 24.21,49.72 36.67,37.26 v39.51,37.26
  pour Top: -13.33,116.8 -13.33,-6.41 192.83,-6.41 192.86,-6.43 193.13,-6.7 193.13,112.67 190.43,115.38 -5.36,115.38 -5.39,115.39 -10.06,120.06
  pour Bottom: -11.88,-6.29 196.59,-6.29 204.49,1.61 204.49,113.54 196.98,121.05 -14.87,121.05 -16.81,119.12 -16.81,-1.36
GPIO8
  Top 0.15: R1.1 19.22,46.6 19.22,48.54 U2.10
I2C_PW  (via drill 0.3)
  Top 0.15: 156.27,4.85 157.45,4.85 R1-PINH.2 157.45,4.92 158.69,6.16 C2.1 | 156.27,4.85 155.02,6.09 C1.1 155.02,6.16 155.02,6.44 156.34,7.76 156.34,7.83 | 156.27,4.85 R2-PINH.2 | 156.34,7.83 155.92,8.24 155.92,8.52 SENSOR2.8 155.85,8.59 155.37,9.07 155.37,11.98 | 156.34,7.83 156.96,7.83 157.45,8.31 157.45,8.52 SENSOR2.6 | 155.37,11.98 155.58,12.19 156.2,12.19 156.62,11.77 156.62,11.49 SENSOR2.2 | v39.79,60.18 29.82,60.18 28.09,58.45 23.24,58.45 21.86,59.83 21.86,66.06 U2.17 | v130.09,36.36 130.3,36.36 154.68,11.98 155.37,11.98
  Bottom 0.15: v39.79,60.18 40,60.18 63.82,36.36 v130.09,36.36
INT_RTC
  Top 0.15: 85.5,56.85 85.5,60.87 85.84,61.22 85.84,61.98 U3.3 | 85.5,56.85 85.5,54.02 85.36,53.88 85.36,51.66 85.91,51.11 85.91,50.28 R1-PINH1.1 | 15.66,47.26 2.26,33.86 1.98,33.86 TP15.TP | 15.66,47.26 16.66,48.27 16.66,48.54 U2.8 | 85.5,56.85 43.32,56.85 31.13,44.67 18.25,44.67 15.66,47.26
IO/BOOT  (via drill 0.3)
  Top 0.15: C6.1 67.35,108.65 66.45,108.65 65.76,109.35 BOOT_BUTTON.3 65.69,109.42 62.3,109.42 BOOT_BUTTON.4 62.23,109.35 61.53,108.65 R_BOOT.1 60.5,108.58 60.15,108.24 v59.73,108.24 | v24.35,72.85 24.35,66.13 U2.15
  Bottom 0.15: v59.73,108.24 v24.35,72.85
IO/CHANGE  (via drill 0.3)
  Top 0.15: R_CHANGE.1 27.74,108.65 26.49,108.65 25.8,109.35 CHANGE_BUTTON.3 25.73,109.42 22.27,109.42 CHANGE_BUTTON.4 22.2,109.35 21.51,108.65 C10.1 20.54,108.58 v14.24,102.28 | v14.24,68.49 14.24,66.13 U2.23
  Bottom 0.15: v14.24,102.28 v14.24,68.49
MISO  (via drill 0.3)
  Top 0.15: R8.1 45.75,35.25 45.75,36.98 D12.2 45.75,37.05 45.75,37.26 46.44,37.95 46.44,39.2 | v7.73,92.1 6.14,93.69 6,93.69 J4.P7 | v8.28,67.93 8.28,67.17 9.04,66.41 9.04,66.13 U2.27 9.11,66.06 9.11,64.96 21.92,52.15 22.2,52.15 29.96,59.9 31.76,59.9 31.9,59.76 31.9,59.14 31.27,58.52 31.27,58.24 U1.2 31.34,58.24 31.62,57.96 v32.1,57.96 | 46.44,39.2 46.44,43.63 v38.61,51.45 | 46.44,39.2 40.07,39.2 39.03,38.16 39.03,34.21 69.08,4.16 69.08,3.6 TP6.TP
  Bottom 0.15: v7.73,92.1 7.73,68.49 v8.28,67.93 | v32.1,57.96 v38.61,51.45
MOSI  (via drill 0.3)
  Top 0.15: TP7.TP 1.98,37.19 4.34,37.19 15.41,48.27 15.41,48.54 U2.7 15.41,48.61 15.41,49.51 10.98,53.95 v10.98,54.15 | v5.23,88.57 5.93,89.26 J4.P3 | v82.8,13.99 83.21,14.4 83.21,14.75 J1.14 | v44.91,35.18 43.81,35.18 R7.1 43.81,35.25 D11.2 | v39.03,53.6 39.03,55.61 U1.5
  Bottom 0.15: v5.23,88.57 5.23,68.9 10.98,63.16 10.98,59.69 | v10.98,54.15 10.98,59.69 | v82.8,13.99 67.08,13.99 45.88,35.18 v44.91,35.18 44.91,46.4 39.03,52.28 v39.03,53.6 38.96,53.6 32.87,59.69 10.98,59.69
N$2
  Top 0.15: R2-USB1.2 151.01,53.39 151.01,53.25 152.46,51.8 152.46,51.31 152.6,51.18 162.02,51.18 163.89,53.05 164.37,53.05 J2.A5
N$6
  Top 0.15: R2-USB.2 157.86,55.47 163.26,55.47 163.82,56.02 164.37,56.02 J2.B5
N$10
  Top 0.15: C1_BAT1.1 112.02,40.3 112.02,42.45 D2.1 112.09,42.45 114.23,42.45 | 114.23,42.45 114.86,42.45 IC4.3 | 114.23,42.45 114.23,43.84 114.72,44.32 114.86,44.32 IC4.1 114.93,44.39 115.14,44.39 119.5,48.75 125.25,48.75 125.87,48.13 126.63,48.13 Q1.2
N$11
  Top 0.15: C4.1 93.81,35.39 93.04,35.39 89.44,31.79 88.4,31.79 D4.1 88.4,31.86 88.4,33.1 83,38.5 83,39.27 D3.2
N$12
  Top 0.15: R1_BAT.2 116.17,51.8 117.14,51.8 117.28,51.94 119.77,51.94 120.26,51.45 120.54,51.45 MCP73831.1
N$14
  Top 0.15: CHG_LED.C 114.65,51.94 114.79,51.8 R1_BAT.1
N$15
  Top 0.15: R2_BAT.2 117.91,49.65 117.91,51.38 MCP73831.5
N$16
  Top 0.15: J1.24 78.22,14.82 78.22,23.55 78.16,23.61 EPD_C12.1
N$17
  Top 0.15: C_DELAY.1 52.53,102.35 51.98,102.35 50.52,103.81 IC1.5
N$18
  Top 0.15: J1.22 79.26,14.82 79.26,21.26 81.62,23.61 EPD_C10.1
N$20
  Top 0.15: J1.20 80.3,14.82 80.3,18.84 85.08,23.61 EPD_C8.1
N$21
  Top 0.15: J1.19 80.79,14.82 80.79,17.59 86.81,23.61 EPD_C7.1
N$22
  Top 0.15: J1.18 81.27,14.82 81.27,16.9 87.92,23.55 87.92,24.24 88.61,24.93 EPD_C6.1
N$25  (via drill 0.3)
  Top 0.15: v87.99,15.58 88.2,15.37 88.2,14.82 J1.4 | v65.9,14.54 65.21,13.85 EPD_C1.1
  Bottom 0.15: v87.99,15.58 86.88,14.47 83.9,14.47 82.93,13.5 66.94,13.5 v65.9,14.54
N$26  (via drill 0.3)
  Top 0.15: v87.36,15.58 87.71,15.23 87.71,14.82 J1.5 | v69.22,14.47 68.32,13.57 EPD_C2.1
  Bottom 0.15: v87.36,15.58 70.33,15.58 v69.22,14.47
N$29
  Top 0.15: R_CAPACITOR.1 88.06,64.13 88.06,65.93 88.27,66.13 D7.1
PREVGH  (via drill 0.3)
  Top 0.15: J1.21 79.82,14.82 79.82,20.08 83.35,23.61 EPD_C9.1 83.42,23.68 83.97,24.24 87.3,24.24 v87.71,24.65 | v88.96,32.55 91.8,35.39 D5.1
  Bottom 0.15: v88.96,32.55 88.96,25.9 v87.71,24.65
PREVGL
  Top 0.15: J1.23 78.78,14.82 78.78,22.51 79.82,23.55 EPD_C11.1 79.89,23.61 80.51,24.24 82.03,24.24 82.31,24.52 82.31,25 82.86,25.55 84.04,25.55 90.2,31.72 91.8,31.72 D4.2
RESE
  Top 0.15: J1.3 88.75,14.82 88.75,20.91 92.63,24.79 92.63,32.27 92.49,32.41 90.48,32.41 83.9,25.83 77.88,25.83 71.51,19.46 R3.2 71.44,19.46 71.37,19.46 70.75,18.84 69.57,18.84 67.97,17.24 67.97,16.14 Q3.2
RESE'
  Top 0.15: R3.1 71.51,18.07 71.23,17.8 71.23,16.07 R2.2 71.16,16 71.16,15.3 68.81,12.95 67.7,12.95 67.49,13.16 65.34,13.16 64.51,12.33 64.51,12.19 SJ1.2
RESET  (via drill 0.3)
  Top 0.15: R_RESET.1 52.53,108.65 51.49,108.65 50.8,109.35 RESET_BUTTON.3 50.73,109.42 47.27,109.42 RESET_BUTTON.4 47.2,109.35 47.06,109.35 45.75,108.03 v45.75,107.96 45.05,108.65 C5.1 | v47.69,105.05 47.69,103.88 IC1.1 47.62,103.88 46.99,103.25 46.99,87.19 23.52,63.71 v23.52,59.21 | v10.43,52.91 10.43,48.61 U2.3
  Bottom 0.15: v47.69,105.05 47.69,106.02 v45.75,107.96 | v10.43,52.91 16.73,59.21 v23.52,59.21
RTC_RST
  Top 0.15: U2.16 23.03,66.06 23.03,59.07 23.38,58.72 27.95,58.72 29.96,60.73 83.69,60.73 84.6,61.63 84.6,61.98 U3.4
RX
  Top 0.15: U2.24 12.92,66.13 12.92,69.11 13.34,69.53 TP2.TP
SCK  (via drill 0.3)
  Top 0.15: TP8.TP 1.98,40.65 7.24,40.65 14.17,47.58 14.17,48.54 U2.6 14.17,48.61 14.17,50.34 7.17,57.34 7.17,66.97 7.31,67.1 v7.31,67.45 | v7.11,91.48 6,91.48 J4.P5 | v83.21,16.07 83.69,15.58 83.69,14.82 J1.13 | v64.65,34.62 41.45,34.62 40.9,35.18 R6.1 40.83,35.25 40.62,35.46 D10.2 | v40.62,56.85 39.72,56.85 | 39.72,56.85 39.03,56.85 U1.6 | 39.72,56.85 v39.72,59
  Bottom 0.15: v7.11,91.48 7.11,67.66 v7.31,67.45 17.01,67.45 24.21,60.25 38.48,60.25 v39.72,59 | v83.21,16.07 v64.65,34.62 63.06,34.62 40.83,56.85 v40.62,56.85
SCL  (via drill 0.3)
  Top 0.15: v157.86,7.69 157.45,7.69 156.27,6.51 156.27,6.16 R2-PINH.1 | v157.86,10.32 157.86,10.8 158.21,11.15 158.21,11.43 SENSOR2.4 | v164.16,20.08 164.86,20.77 165.2,20.77 J3.4 | v130.58,52.35 130.58,52.63 130.16,53.05 129.88,53.05 U4.7 | 88.75,52.84 88.61,52.84 88.47,52.7 U3.16 | 88.75,52.84 v91.66,52.84 | v21.37,64.47 19.36,64.47 18.05,65.79 18.05,66.06 U2.20 | v86.81,54.85 88.75,52.91 88.75,52.84
  Bottom 0.15: v164.16,20.08 164.16,19.94 164.58,19.53 164.58,17.11 157.86,10.39 v157.86,10.32 v157.86,7.69 157.86,6.86 157.52,6.51 157.24,6.51 130.58,33.17 v130.58,52.35 92.14,52.35 v91.66,52.84 | v21.37,64.47 36.54,64.47 46.16,54.85 v86.81,54.85
SDA  (via drill 0.3)
  Top 0.15: v157.38,6.99 157.45,6.92 157.45,6.16 R1-PINH.1 | v157.38,9.97 157.38,11.36 157.45,11.43 SENSOR2.3 | v164.09,19.39 164.44,19.74 165.2,19.74 J3.3 | v129.33,54.08 129.82,53.6 U4.8 | v86.95,54.08 86.95,52.91 87.16,52.7 U3.15 | v20.12,64.96 19.29,65.79 19.29,66.06 U2.19
  Bottom 0.15: v157.38,6.99 v157.38,9.97 157.38,10.46 164.09,17.17 v164.09,19.39 164.09,19.46 129.47,54.08 v129.33,54.08 v86.95,54.08 86.88,54.08 86.4,54.57 46.02,54.57 39.93,60.66 24.56,60.66 20.26,64.96 v20.12,64.96
SRC  (via drill 0.3)
  Top 0.15: C4.2 93.81,36.7 89.65,36.7 88.4,35.46 D5.2 88.33,35.52 v86.6,35.52 | v76.49,27.49 67.28,18.28 Q3.3 | L1.1 81.25,36 v80.6,35.35
  Bottom 0.15: v76.49,27.49 76.49,31.25 v80.6,35.35 80.77,35.52 v86.6,35.52
SS_SD
  Top 0.15: D8.2 12.3,98.2 11.88,98.61 9.88,98.61 R10.1 9.88,98.54 9.88,91.83 6.41,88.36 6.41,88.22 J4.P2 6.41,88.16 6.97,87.6 6.97,86.7 6.83,86.56 6.83,57.27 11.61,52.49 11.61,48.61 U2.4
TX
  Top 0.15: U2.25 11.61,66.13 11.61,68.97 11.05,69.53 TP1.TP
USB_D+  (via drill 0.3)
  Top 0.15: v151.63,55.26 D1.1 | v40.34,50.34 v45.82,55.82 | v26.08,50.34 24.35,48.61 U2.14
  Bottom 0.15: v151.63,55.26 129.19,55.26 128.64,55.82 v45.82,55.82 | v26.08,50.34 v40.34,50.34
USB_D-  (via drill 0.3)
  Top 0.15: v151.84,53.05 151.84,52.91 153.01,51.73 153.29,51.73 D1.3 | v40.83,49.86 v46.3,55.33 | v24.69,49.86 24.07,49.86 23.1,48.89 23.1,48.61 U2.13
  Bottom 0.15: v151.84,53.05 130.99,53.05 128.71,55.33 v46.3,55.33 | v24.69,49.86 v40.83,49.86
VBAT
  Top 0.3: U4.2 127.88,53.05 127.88,52.63 U4.3 127.74,52.49 127.39,52.49 125.9,51 | 125.9,51 125.8,50.9 125.8,50.21 Q1.3 | 122.09,54.81 120.61,53.32 MCP73831.3 | 122.09,54.81 122.68,55.4 124,55.4 C2_BAT.1 124.14,55.47 124.34,55.68 133.35,55.68 TP3.TP | 122.09,54.81 125.9,51
VBUS
  Top 0.3: R1_PWRUSB.2 109.8,44.32 111.67,44.32 111.95,44.6 D2.2 112.02,44.74 112.02,50 112.85,50.83 112.92,50.97 | MCP73831.4 117.91,53.25 116.17,53.25 CHG_LED.A 116.03,53.12 115.48,52.56 115.48,51.18 115.27,50.97 112.92,50.97 | 112.92,50.97 110.7,53.18 C1_BAT.1 110.77,53.32 114.44,56.99 133.97,56.99 134.73,56.23 134.73,43.28 | 154.19,55.82 154.19,63.43 153.64,63.99 TP14.TP | 154.19,55.82 154.19,53.88 155.37,52.7 155.78,52.7 D1.5 | C5_USB.1 155.85,49.86 155.85,48.41 C4_USB.1 155.92,48.27 155.92,47.64 | 134.73,43.28 153.91,43.28 155.99,45.36 PFMF.050.1.2 155.92,45.5 155.92,47.64 | 134.73,43.28 130.16,43.28 125.38,48.06 124.83,48.06 Q1.1 | 154.19,55.82 151.42,55.82 149.9,54.29 149.9,51.8 154.05,47.64 155.92,47.64
VRTC
  Top 0.3: C10_SUPERCAP.2 93.6,52.28 90.97,52.28 C8.1 90.83,52.22 89.65,52.22 88.75,51.31 86.81,51.31 85.98,52.15 85.98,52.56 U3.14 85.91,52.7 85.91,54.71 86.53,55.33 86.53,63.09 86.67,63.23 86.67,64.06 R_CAPACITOR.2
VUSB
  Top 0.3: J2.A4 164.44,51.8 164.44,52.01 J2.B9 164.58,52.08 165.06,52.08 165.62,52.63 165.62,56.02 165.13,56.51 164.58,56.51 J2.B4 164.44,56.58 164.44,56.78 J2.A9 164.3,56.85 162.64,56.85 154.19,65.3 153.01,65.3 149.41,61.7 149.41,47.51 151.49,45.43 PFMF.050.1.1

## Text on the board
tPlace: EPD_3V3_C | TX | RX | VBUS | VBAT | 3V3 | SCK | MOSI | INT_RTC | EPD_3V3 | EPD_RST | GND | GND | EPD_DC | EPD_CS | MISO | EPD_BUSY